# Altium PCB GSMMHMSlim.PcbDoc
Units mm, origin at the board's own origin, x right, y up, seen from the top; angles counter-clockwise.
Board outline 34.5 x 23.5 mm, 2 copper layers (Top Layer, Bottom Layer); 27 components, 34 nets, 158 pads, 112 vias.
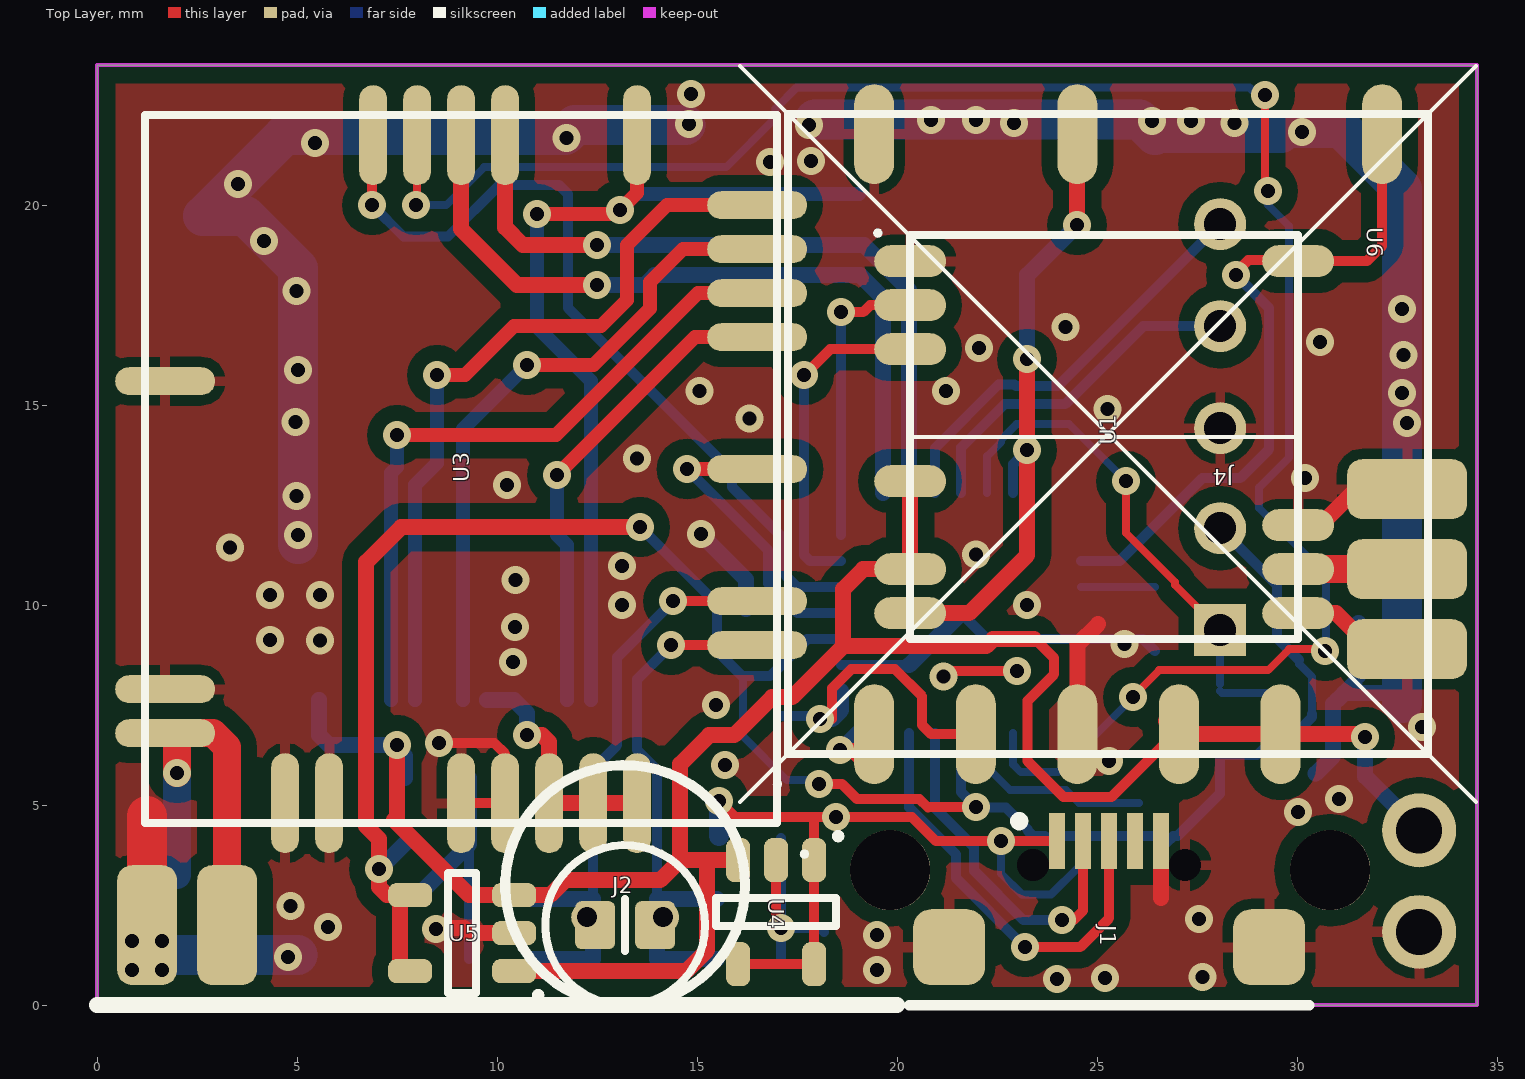
[diagram p0: Top Layer view]
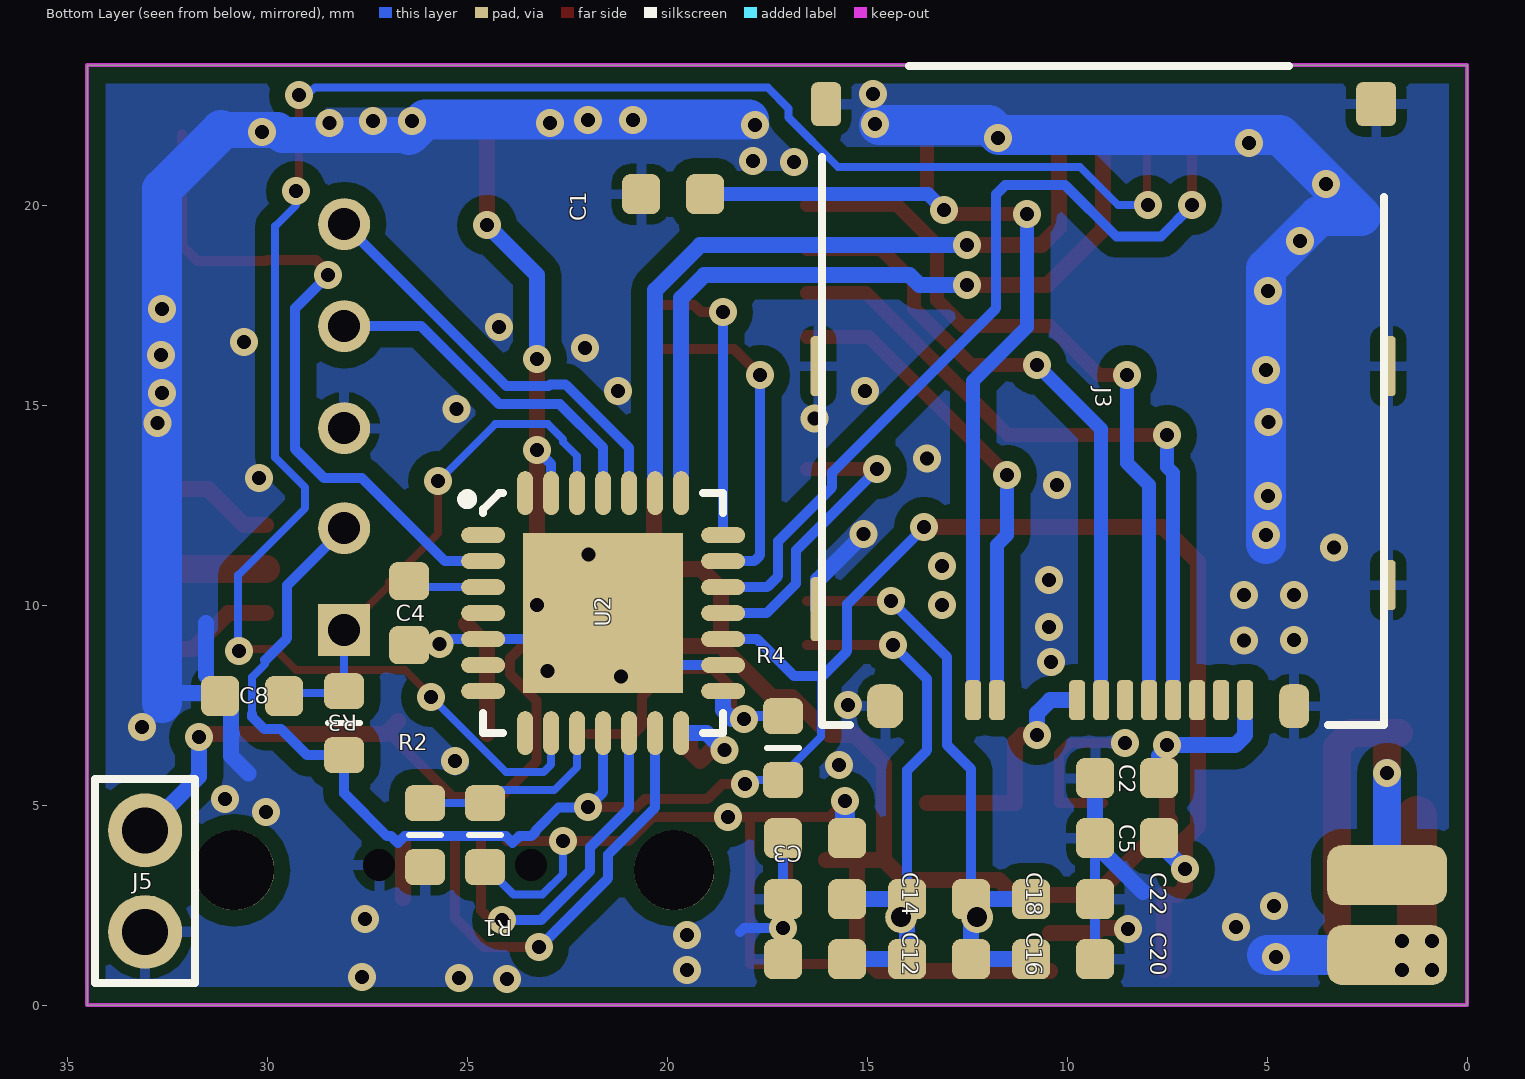
[diagram p1: Bottom Layer view, seen from below]
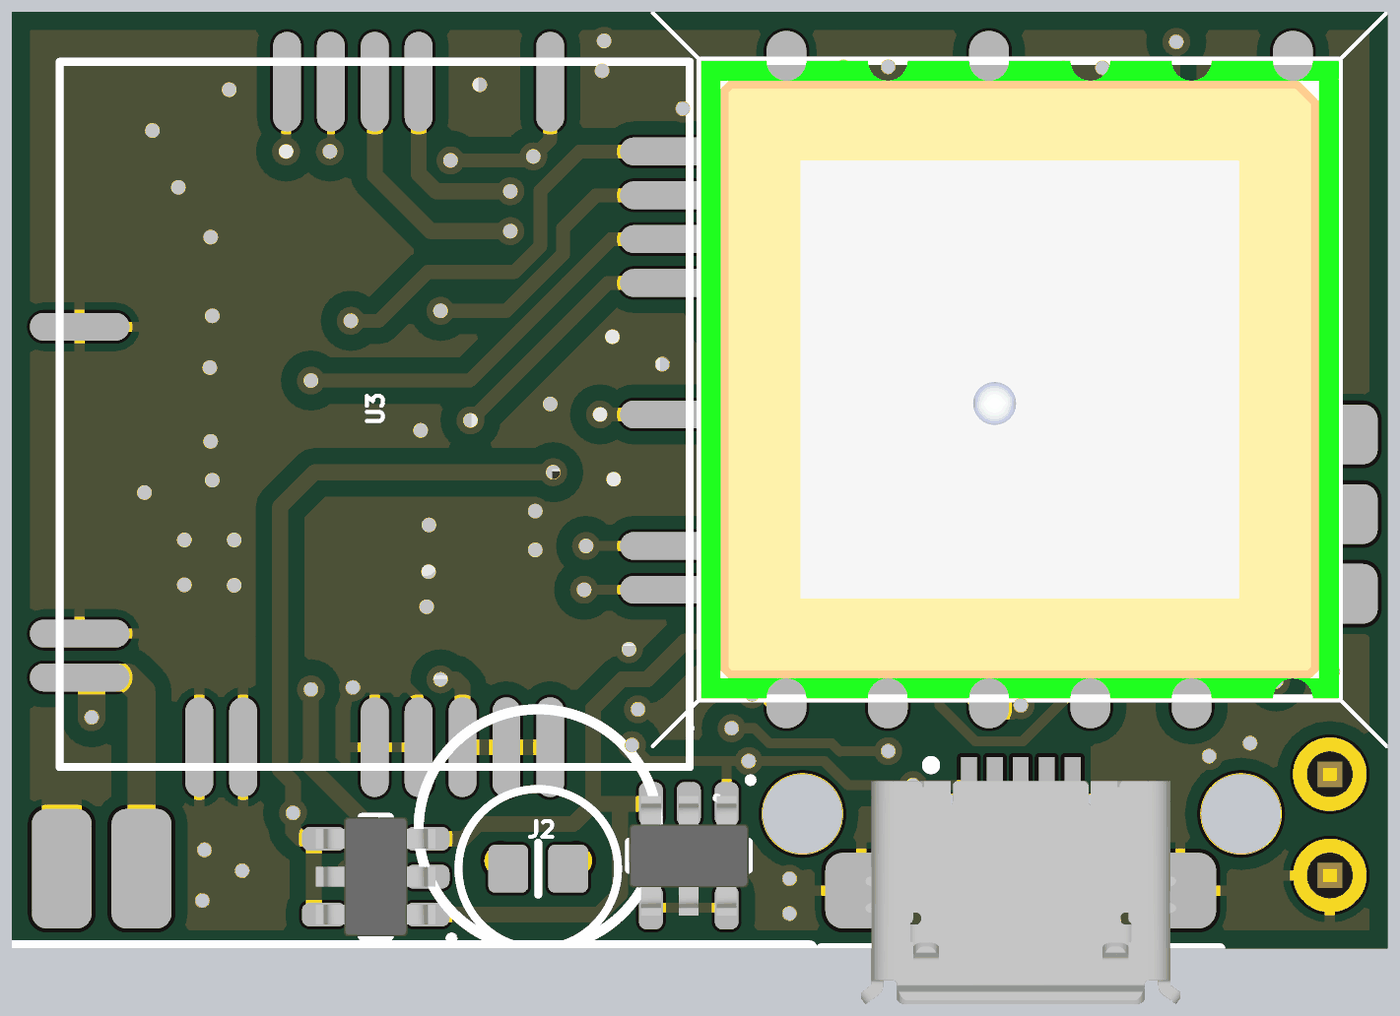
[diagram p2: 3D render of the assembled board from above, using the file's embedded part models]
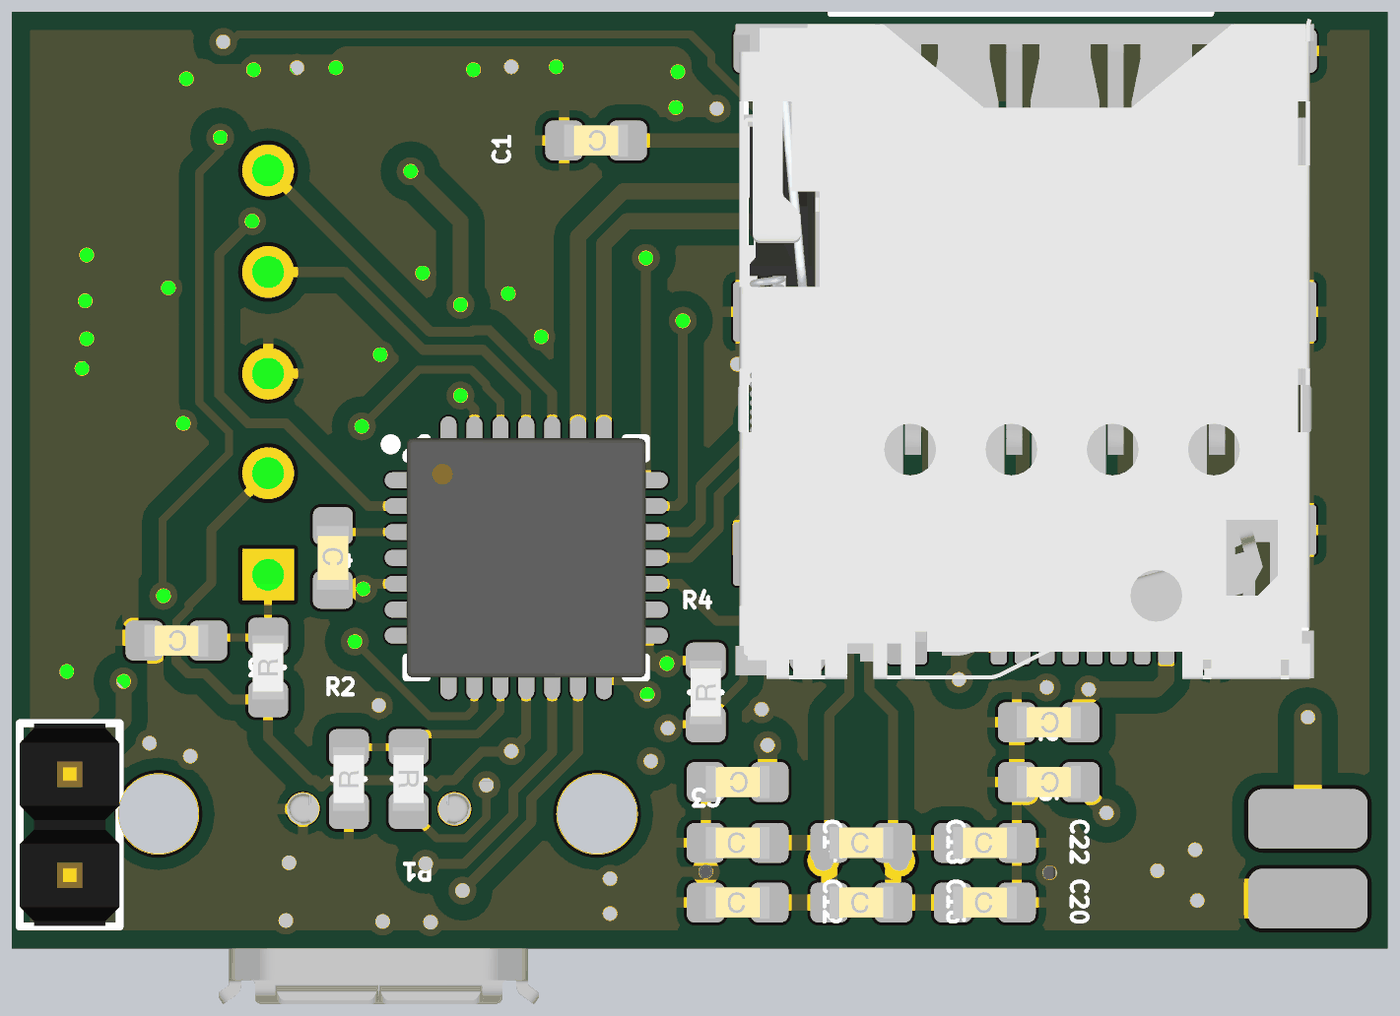
[diagram p3: 3D render of the assembled board from below, using the file's embedded part models]

## Layer stack, top to bottom
Top Solder: solder mask 0.0102, Solder Resist, Dk 3.5
Top Layer: signal copper 0.0356
Dielectric 1: dielectric 0.32, FR-4, Dk 4.8
Bottom Layer: signal copper 0.0356
Bottom Solder: solder mask 0.0102, Solder Resist, Dk 3.5

## Board outline
0,0 34.5,0 34.5,23.5 0,23.5

## Design rules (kind name [scope] priority, off if disabled: settings)
Clearance Clearance_110V_Keepout [InNetClass('110V') vs OnLayer('Keep-Out Layer')] p1: gap=0.3
Clearance Clearance_Q1Q2Q3 [(InComponent('Q1') OR InComponent('Q2') OR InComponent('Q3')) vs (InComponent('Q1') OR InComponent('Q2') OR InComponent('Q3'))] p2: gap=1
Clearance Clearance_110V_NoNet [InNetClass('110V') vs InNet('No Net')] p3: gap=0.5
Clearance Clearance_220V_110V [InNetClass('220V') vs InNetClass('110V')] p4: gap=1
Clearance Clearance_240VAC_220V [InNet('240VAC') vs InNetClass('220V')] p5: gap=1
Clearance Clearance_Poly [All vs InPolygon] p6: gap=0.4
Clearance Clearance_TrackAll [All vs IsTrack] p7: gap=0.2
Clearance Clearance_TrackU4 [InComponent('U4') vs IsTrack] p8: gap=0.25
Clearance Clearance_220V [InNetClass('220V')] p9: gap=2
Clearance Clearance_110V [InNetClass('110V')] p10: gap=1
Clearance [All] p11: gap=0.2
ComponentClearance [All] p1 off: gap=0.254 collisioncheckmode=3 verticalgap=0.254 showdistances=FALSE
Height [All] p1 off: minheight=0 maxheight=25.4 prefheight=12.7
PolygonConnect PolygonConnect_1 [InPadClass('Flooded')] p1: connectstyle=Direct reliefconductorwidth=0.254 reliefentries=4 polygonreliefangle="90 Angle" airgapwidth=0.254
PolygonConnect PolygonConnect_GND [All vs IsVia] p2: connectstyle=Direct reliefconductorwidth=0.254 reliefentries=4 polygonreliefangle="90 Angle" airgapwidth=0.254
PolygonConnect [All] p3: connectstyle=Relief reliefconductorwidth=0.254 reliefentries=4 polygonreliefangle="90 Angle" airgapwidth=0.254
RoutingVias [All] p1: holewidth=0.711 width=1.27 viastyle="Through Hole" minholewidth=0.711 minwidth=1.27 maxholewidth=0.711 maxwidth=1.27
SolderMaskExpansion [All] p1: expansion=0.102
UnpouredPolygon [All] p1: allowunpoured=FALSE
Width [All] p1: maxlimit=5 minlimit=0.2 preferedwidth=0.5
27 further rules are at their usual default settings.

## Classes and differential pairs
pad class Flooded: U1-3

## Components (designator, comment, footprint, x,y, rotation, side; value= is the part's Value field where it differs from the comment)
C1 "1uF" SMD_0603_CAPC1608X95N 19.85,20.275 r0 bottom
C2 "1uF" SMD_0603_CAPC1608X95N 8.5,5.675 r0 bottom
C3 "1uF" SMD_0603_CAPC1608X95N 16.3,4.175 r0 bottom
C4 "4.7uF" SMD_0603_CAPC1608X95N 26.45,9.8 r270 bottom
C5 "4.7uF" SMD_0603_CAPC1608X95N 8.5,4.175 r0 bottom
C8 "100nF" SMD_0603_CAPC1608X95N 30.375,7.725 r0 bottom
C12 "33pF" SMD_0603_CAPC1608X95N 16.3,1.15 r180 bottom
C14 "33pF" SMD_0603_CAPC1608X95N 16.3,2.65 r180 bottom
C16 "33pF" SMD_0603_CAPC1608X95N 13.2,1.15 r180 bottom
C18 "33pF" SMD_0603_CAPC1608X95N 13.2,2.65 r180 bottom
C20 "33pF" SMD_0603_CAPC1608X95N 10.1,1.15 r180 bottom
C22 "33pF" SMD_0603_CAPC1608X95N 10.1,2.65 r180 bottom
J1 "ATTEND 207A-BBA0-R" SMD_CON_MICRO_USB 25.3,4.1 r270 top
J2 "CON_2PINS" PTH_MIC_6MM_2.7MM_PITCH1.9 13.2,3 r180 top
J3 "MICRO SIM" SMD_CON-WURTH_MICRO_SIM_693021010811 9.1,7.125 r0 bottom
J4 "CON_5PINS" "SIP5 - PGM" 28.075,14.45 r90 top
J5 "CON_2PINS" PTH_HDRV02W64P254_1X02 33.05,3.1 r90 bottom
R1 "20k" SMD_0603_RESC1608X55N 24.55,4.25 r270 bottom
R2 "20k" SMD_0603_RESC1608X55N 26.05,4.25 r90 bottom
R3 "2k" SMD_0603_RESC1608X55N 28.075,7.05 r90 bottom
R4 "20k" SMD_0603_RESC1608X55N 17.1,6.425 r90 bottom
U1 "QUECTEL_L80 / L86" "SMD_MOD_L80_SOIC254P1600X1600-12N - NO UNUSED PINS" 25.275,14.275 r90 top locked
U2 "PIC18F27J53_QFN" SMD_QFN65P600X600X100-29AN 21.6,9.8 r180 bottom
U3 "QUECTEL_M66" "SMD_MOD_M66-44N - NO UNUSED PINS" 9.1,13.4 r180 top
U4 "MCP73811 450mA" "SMD_SOT26_SOT95P285X140-5N - DLV" 16.975,2.325 r270 top
U5 "BU33TD3WG" "SMD_SOT26_SOT95P285X140-5N - DLV" 9.125,1.8 r180 top
U6 "QUECTEL_L76" "SMD_MOD_L76_SOIC110P970X1010-18N - NO UNUSED PINS" 25.175,14.2 r0 top

## Footprints (in the part's own frame and the unit in brackets; to place one, negate y for a bottom-side part, rotate by r counter-clockwise, add the part's x,y. Pads: shape width x height; smd on the part's side, far side on the other; paste and mask are expansions set on the pad)
PTH_HDRV02W64P254_1X02 [mm]
  round 1.85 hole 1.15 mask+0.075: 1(-1.27,0) 2(1.27,0)
  silkscreen extent -2.55,-1.25 2.55,1.25, body extent -2.54,-1.25 2.54,1.25, height 8
PTH_MIC_6MM_2.7MM_PITCH1.9 [mm] "PMO-6027P-40KDQ(20120820)"
  round 0.8 hole 0.5: 1(-0.95,0.8) 2(0.95,0.8)
  rrect33% 1x1.2 smd mask+0.075: 1(-0.75,1) 2(0.75,1)
  silkscreen extent -3,-3 3,3, body extent -2.98,-2.99 3,2.99, height 6.45
"SIP5 - PGM" [mm]
  rect 1.3x1.3 hole 0.8: 1(-5.075,0)
  round 1.3 hole 0.8: 2(-2.525,0) 3(-0.025,0) 4(2.525,0) 5(5.075,0)
SMD_0603_CAPC1608X95N [mm]
  rrect42% 0.95x1 smd mask+0.075: 1(-0.8,0) 2(0.8,0)
  body extent -0.8,-0.4 0.8,0.4, height 0.95
SMD_0603_RESC1608X55N [mm]
  rrect44% 0.9x1 smd mask+0.075: 1(-0.8,0) 2(0.8,0)
  silkscreen extent 0,-0.4 0,0.4, body extent -0.8,-0.4 0.8,0.4, height 0.55
SMD_CON-WURTH_MICRO_SIM_693021010811 [mm] "WURTH Micro SIM 693021010811"
  rrect50% 0.4x1 smd mask+0.05: 1(3.25,-0.5) 2(0.05,-0.5) 3(-1.15,-0.5) 4(-2.35,-0.5) 5(2.65,-0.5) 6(-0.55,-0.5) 7(-1.75,-0.5) 8(-2.95,-0.5) 9(-3.55,-0.5) 10(0.65,-0.5)
  rrect67% 0.75x1.1 smd mask+0.05: 11(-4.775,-0.35)
  rrect67% 0.9x1.1 smd mask+0.05: 12(5.45,-0.35)
  rrect44% 0.375x1.6 smd mask+0.05: 13(7.125,-2.775)
  rrect44% 0.375x1.5 smd mask+0.05: 14(7.125,-8.85) 17(-7.125,-8.85)
  rrect44% 0.75x1.1 smd mask+0.05: 15(6.925,-15.4)
  rrect33% 1x1.1 smd mask+0.05: 16(-6.825,-15.4)
  rrect44% 0.375x1.25 smd mask+0.05: 18(-7.125,-3.375)
  silkscreen extent -7.02,-16.35 7.02,0.13, body extent -7.25,-16.21 7.25,0.38, height 1.2
SMD_CON_MICRO_USB [mm]
  rect 1.4x0.4 smd: 1(0,-1.3) 2(0,-0.65) 3(0,0) 4(0,0.65) 5(0,1.3)
  round 0.7 hole 0.8: 6(0.6,1.9) 9(0.6,-1.9)
  rrect50% 1.9x1.8 smd: 7(2.65,4) 8(2.65,-4)
  silkscreen extent -0.6,-5 4.1,5, body extent -0.1,-4 5.5,4, height 2.7
"SMD_MOD_L76_SOIC110P970X1010-18N - NO UNUSED PINS" [mm] "Quectel L76"
  oval 1.8x0.8 smd mask+0.075: 1(-4.85,4.4) 2(-4.85,3.3) 3(-4.85,2.2) 6(-4.85,-1.1) 8(-4.85,-3.3) 9(-4.85,-4.4) 10(4.85,-4.4) 11(4.85,-3.3) 12(4.85,-2.2) 18(4.85,4.4)
  silkscreen extent -5.77,-5.05 4.85,5.22, body extent -4.85,-5.05 4.85,5.05, height 2.52
"SMD_MOD_L80_SOIC254P1600X1600-12N - NO UNUSED PINS" [mm] "Quectel L80 L86"
  oval 2.5x1 smd mask+0.075: 1(-7.5,5.85) 2(-7.5,3.31) 3(-7.5,0.77) 4(-7.5,-1.77) 5(-7.5,-4.31) 7(7.5,-6.85) 10(7.5,0.77) 12(7.5,5.85)
  silkscreen extent -9.2,-9.2 9.2,9.2, body extent -8,-8 8,8, height 6.95
"SMD_MOD_M66-44N - NO UNUSED PINS" [mm] "Quectel M66"
  oval 2.5x0.7 smd mask+0.075: 3(-7.4,4.4) 4(-7.4,3.3) 7(-7.4,0) 10(-7.4,-3.3) 11(-7.4,-4.4) 12(-7.4,-5.5) 13(-7.4,-6.6) 27(7.4,-2.2) 34(7.4,5.5) 35(7.4,6.6)
  oval 0.7x2.5 smd mask+0.075: 14(-4.4,-8.35) 17(-1.1,-8.35) 18(0,-8.35) 19(1.1,-8.35) 20(2.2,-8.35) 36(4.4,8.35) 37(3.3,8.35) 40(0,8.35) 41(-1.1,8.35) 42(-2.2,8.35) 43(-3.3,8.35) 44(-4.4,8.35)
  silkscreen extent -8.69,-8.85 7.9,9.73, body extent -7.9,-8.85 7.9,8.85, height 2.3
SMD_QFN65P600X600X100-29AN [mm]
  oval 1.1x0.4 smd mask+0.05: 1(-3,1.95) 2(-3,1.3) 3(-3,0.65) 4(-3,0) 5(-3,-0.65) 6(-3,-1.3) 7(-3,-1.95) 15(3,-1.95) 16(3,-1.3) 17(3,-0.65) 18(3,0) 19(3,0.65) 20(3,1.3) 21(3,1.95)
  oval 0.4x1.1 smd mask+0.05: 8(-1.95,-3) 9(-1.3,-3) 10(-0.65,-3) 11(0,-3) 12(0.65,-3) 13(1.3,-3) 14(1.95,-3) 22(1.95,3) 23(1.3,3) 24(0.65,3) 25(0,3) 26(-0.65,3) 27(-1.3,3) 28(-1.95,3)
  rect 4x4 smd paste-0.95 mask+0.05: 29(0,0)
  silkscreen extent -3.53,-3 3,3, body extent -3,-3 3.01,3.01, height 1
"SMD_SOT26_SOT95P285X140-5N - DLV" [mm]
  rrect67% 1.1x0.6 smd mask+0.075: 1(-1.3,0.95) 2(-1.3,0) 3(-1.3,-0.95) 4(1.3,-0.95) 5(1.3,0.95)
  silkscreen extent -2.05,-1.5 0.35,1.7, body extent -1.5,-1.5 1.5,1.5, height 1.2

## Part data
C1 C2 C3 C4 C5 C8 C12 C14 C16 C18 C20 C22: library part C
J1: library part CON_USB_MINI
J3: library part CON_2ROWS_18PINS
R1 R2 R3 R4: library part R
U1: library part MOD_QUECTEL_L80_L86
U2: library part IC_PIC18F27J53_QFN
U3: library part MOD_QUECTEL_M66
U4: "MCP73812"
U5: library part IC_BU33TD3WG
U6: library part MOD_QUECTEL_L76

## Free pads (board coordinates)
  rrect50% 1.5x3 smd: 0(1.25,2) 0(3.25,2)
  rrect50% 3x1.5 smd far side: 0(2,1.25) 0(2,3.25)
  rrect50% 3x1.5 smd: 0(32.75,8.9) 0(32.75,10.9) 0(32.75,12.9)
  round 2 hole 2: 1(19.825,3.375) 1(30.825,3.375)

## Via types
v1: diameter 0.7, hole 0.35, Top Layer to Bottom Layer, tented both sides, 112 vias

## Nets (pads, with @x,y where several pads share a name; then routed paths per layer and width w, separated by ;. In a path a pad name is that pad's centre, name@x,y a point inside that pad or via, vN(x,y) a via of type N, cw(c..) or ccw(c..) an arc to the next point about the centre after c; other vN are vias at no path point)
3.3V: C5.1 J4.2 R3.1 R4.1 U2.11 U2.17 U5.4 U5.5 | length 53.3
  Top Layer w0.25: v1@18.275,5.525 18.625,5.525 19,5.15 20.56,5.15 20.772,4.938 20.784,4.95 v1(21.975,4.95)
  Top Layer w0.4: U5.5@7.575,0.875 7.575,2.775 7.25,2.75 7.05,2.95 v1(7.05,3.4) 7.05,4.151 6.725,4.476 6.725,11.075 7.6,11.95 v1(13.575,11.95)
  Bottom Layer w0.2: 16.15,8.225 16.15,6.715 17.24,5.625 18.175,5.625 v1@18.275,5.525 ; 30.05,8.625 30.05,8.532 30.375,8.207 30.375,7.282
  Bottom Layer w0.25: v1(13.575,11.95) 15.5,10.025 15.5,8.85 16.15,8.2 ; 16.15,8.225 16.825,8.225 17.75,9.15 U2.17 ; U2.11 21.6,5.325 21.987,4.938 22.716,4.938 23.275,4.38 23.275,4.35 23.4,4.225 23.7,4.225 23.866,4.06 24.031,4.225 26.569,4.225 26.734,4.06 26.9,4.225 27.004,4.225 28.075,5.296 R3.1 29,6.25 29.65,6.9 30.068,6.9 30.375,7.207 30.375,7.282 ; J4.2 29.5,10.5 29.5,9.175 30.05,8.625
  Bottom Layer w0.4: v1(7.05,3.4) C5.1@7.825,4.175
  other v1: 18.05,5.525
4.0V: C2.1 J3.9 J5.2 U1.4 U1.5 U4.3 U5.1 U5.3 U6.6 U6.8 | length 57.2
  Top Layer w0.25: 23.437,9.163 23.925,8.675 23.925,8.273 23.263,7.611 23.263,6.1 24.163,5.2 25.355,5.2 26.93,6.775 U1.4
  Top Layer w0.4: v1(7.5,6.5) 7.5,4.7 7.425,4.625 9.3,2.75 U5.3 11.325,2.75 11.7,3.125 14.075,3.125 14.575,3.625 ; U5.1 14.725,0.85 15.25,1.375 15.25,3.625 ; U4.3 15.25,3.625 ; U6.6 U6.8 19.15,10.9 18.65,10.4 18.65,8.975 ; 23.425,9.15 22.4,9.15 22.225,8.975 18.65,8.975 ; U1.4@26.725,7.1 U1.4@27.05,6.775 ; U1.4 U1.4@27.05,6.775 ; v1@31.7,6.775 U1.5 U1.4@27.05,6.775 ; 14.575,3.625 14.575,6.025 15.3,6.75 15.925,6.75 16.875,7.7 17.375,7.7 18.65,8.975 ; 14.575,3.625 15.25,3.625
  Bottom Layer w0.4: J3.9 5.55,6.75 5.8,6.5 7.425,6.5 7.7,6.225 C2.1 ; v1@31.7,6.775 31.7,5.72 J5.2
  other v1: 31.7,6.7
5.0V: C3.1 J1.1 J1.9 R1.2 U4.1 U4.4 U4.5 | length 18.6
  Top Layer w0.25: v1(15.55,5.1) 15.95,4.7 17.925,4.7 ; U4.4 U4.5 U4.1 17.925,4.7 ; J1.1 20.974,4.1 20.374,4.7 17.925,4.7
  Bottom Layer w0.2: C3.1 C3.1@15.55,4.225 ; v1(22.6,4.1) 22.6,3.286 23.122,2.764 23.845,2.764 24.531,3.45 R1.2
  Bottom Layer w0.5: C3.1@15.55,4.225 v1(15.55,5.1)
  other v1: 18.475,4.7
DM/D-: J1.2 U2.12 | length 9
  Top Layer w0.25: v1@24.054,2.125 24.406,2.125 24.65,2.369 J1.2
  Bottom Layer w0.25: U2.12 20.95,4.925 21.925,3.95 21.925,3.36 23.16,2.125 v1(24.125,2.125)
DP/D+: J1.3 U2.13 | length 10.9
  Top Layer w0.25: v1(23.2,1.45) 24.575,1.45 25.3,2.175 J1.3
  Bottom Layer w0.25: U2.13 20.3,4.938 21.475,3.763 21.475,3.173 23.198,1.45 v1(23.2,1.45)
FORCE_ON: U1.7 U2.2 U6.18 | length 17.4
  Top Layer w0.25: v1(28.475,18.25) 28.475,18.325 28.775,18.625 30,18.625 U6.18 31.741,18.6 32.125,18.984 U1.7
  Bottom Layer w0.25: U2.2 25.554,11.1 27.629,13.175 28.575,13.175 29.3,13.9 29.3,17.425 v1(28.475,18.25)
GND: C1.2 C2.2 C3.2 C4.2 C5.2 C8.2 C12.1 C14.1 C20.2 C22.2 J1.5 J1.6 J1.7 J1.8 J3.11 J3.12 J3.13 J3.14 J3.15 J3.16 J3.17 J3.18 J4.3 J5.1 pad.0@1.25,2 pad.0@2,1.25 pad.0@32.75,8.9 pad.0@32.75,12.9 R2.1 U1.3 U1.12 U2.5 U2.16 U2.29 U3.27 U3.34 U3.36 U3.37 U3.40 U3.41 U4.2 U5.2 U6.1 U6.10 U6.12 | length 104.5
  Top Layer w0.25: v1(8.55,6.55) 9.935,6.55 10.2,6.285 U3.41 U3.40 ; U4.2 16.975,2.05 v1(17.1,1.925) ; v1@21.156,8.167 21.339,8.35 23.091,8.35 v1@23.191,8.25
  Top Layer w0.4: v1(8.475,1.9) 8.5,1.925 9.175,1.925 9.3,1.8 U5.2 ; U1.3 24.505,9.005 25.025,9.525 ; 26.6,2.685 J1.5 ; U6.10 30.975,9.8 31.875,8.9 pad.0@32.75,8.9 ; U6.12 30.575,12 31.475,12.9 pad.0@32.75,12.9
  Top Layer w1: pad.0@1.25,2 1.25,4.725
  Bottom Layer w0.25: C20.2 9.3,4.025 C5.2 ; C12.1 v1(17.1,1.925) ; C3.2 C14.1 v1(17.1,1.925) ; 18.175,1.83 18.08,1.925 v1(17.1,1.925) ; U2.16 U2.29@20.3,8.5 ; U2.29 22.25,9.15 U2.5 26.15,9.15 C4.2@26.45,8.85
  Bottom Layer w0.4: 8.1,2.825 9.3,4.025 C5.2 C2.2 ; v1(15.09,11.775) 16.225,10.64 J3.13 ; U2.29@20.3,8.5 U2.29 ; 30.462,5.79 30.9,6.228 C8.2@30.9,7.525 ; 30.875,6.775 30.9,6.8 ; C8.2@31,7.625 C8.2@31.175,7.8 ; C8.2@31.438,8.063 C8.2@31.175,7.8 ; 31.528,8.237 31.528,9.549 ; 32.625,7.55 32.375,7.8 C8.2@31.175,7.8
  Bottom Layer w0.9: 26.45,21.75 29.614,21.75 29.739,21.875 31.149,21.875
  Bottom Layer w1: pad.0@2,1.25 v1@5.007,1.25 ; v1@5.025,11.526 5.025,18.411 3.711,19.725 2.65,19.725 4.675,21.75 11.7,21.75 11.95,22 v1@14.709,22 ; v1@17.95,22.14 26.06,22.14 26.45,21.75 ; 31.149,21.875 32.625,20.399 v1(32.625,17.4) v1(32.625,15.3) 32.625,7.55
  other v1: 24,0.657 25.2,0.675 27.629,0.7 0.875,0.875 1.625,0.875 19.5,0.875 4.775,1.2 0.875,1.6 1.625,1.6 19.5,1.75 5.775,1.95 27.55,2.15 4.829,2.475 30.025,4.825 31.05,5.15 15.7,6 25.3,6.1 33.125,6.95 15.475,7.507 21.156,8.217 22.991,8.35 10.401,8.574 25.687,9.023 4.325,9.125 5.575,9.112 10.449,9.452 13.125,10 23.25,10 4.325,10.25 5.575,10.25 10.458,10.627 13.125,10.975 21.965,11.268 3.325,11.44 5.025,11.75 4.985,12.725 10.25,13 30.2,13.175 13.5,13.664 32.742,14.552 4.963,14.575 16.311,14.661 25.261,14.9 15.059,15.35 21.225,15.35 5.025,15.875 32.66,16.25 22.05,16.432 30.575,16.575 24.202,16.95 4.985,17.85 4.175,19.1 3.525,20.525 16.825,21.075 17.85,21.1 5.45,21.55 11.733,21.675 30.125,21.825 17.8,22 14.8,22.025 22.925,22.05 28.438,22.05 26.375,22.1 27.35,22.1 20.85,22.125 21.975,22.125 14.85,22.775
GPS_ANT: pad.0@32.75,10.9 U6.11 | length 2.7
  Top Layer w0.7: U6.11 pad.0@32.75,10.9
GPS_RST: U1.10 U2.27 U6.9 | length 15.8
  Top Layer w0.4: U6.9 21.8,9.8 23.25,11.25 v1(23.25,13.875) v1(23.25,16.15) ; v1(24.5,19.5) 24.5,21.77 U1.10
  Bottom Layer w0.25: U2.27 22.9,13.525 v1(23.25,13.875)
  Bottom Layer w0.4: v1(23.25,16.15) 23.25,18.25 v1(24.5,19.5)
GPS_RX: U1.1 U2.14 | length 2.8
  Top Layer w0.4: v1@18.565,6.35 18.925,6.35 19.175,6.1 19.425,6.35 U1.1
  Bottom Layer w0.4: v1@18.565,6.35 18.665,6.45 19.015,6.8 U2.14
  other v1: 18.565,6.375
GPS_RX_L76: U2.20 U6.3 | length 8.4
  Top Layer w0.25: v1(17.675,15.75) 18.325,16.4 U6.3
  Bottom Layer w0.25: v1(17.675,15.75) 17.675,11.25 17.825,11.1 U2.20
GPS_TX: R4.2 U1.2 U2.15 | length 7.8
  Top Layer w0.25: v1@18.375,7.15 18.375,7.925 18.85,8.4 19.947,8.4 20.625,7.722 20.625,7 20.85,6.775 U1.2
  Bottom Layer w0.25: R4.2 18.3,7.225 v1@18.375,7.15
  Bottom Layer w0.4: v1@18.375,7.15 18.6,7.375 U2.15
  other v1: 18.075,7.15
GPS_TX_L76: U2.21 U6.2 | length 7.4
  Top Layer w0.25: v1(18.6,17.325) 19.15,17.325 19.325,17.5 U6.2
  Bottom Layer w0.25: U2.21 v1(18.6,17.325)
GSM_DTR: U2.9 U3.19 | length 49.5
  Top Layer w0.2: v1(7.975,20) 8,20.025 U3.19 ; v1@25.887,7.712 26.55,8.375 29.275,8.375 29.8,8.9 v1@30.725,8.9 ; v1(29.2,22.75) 29.2,20.425 v1(29.275,20.35)
  Bottom Layer w0.2: v1(7.975,20) 8.725,20 9.675,20.95 15.725,20.95 16.964,22.189 16.964,22.419 17.485,22.94 28.81,22.94 29,22.75 v1(29.2,22.75) ; U2.9 22.9,6.016 23.091,5.825 24.025,5.825 v1(25.9,7.7) v1@25.9,7.725 ; v1(29.275,20.35) 29.275,20 29.8,19.475 29.8,13.694 29.05,12.944 29.05,12.425 30.725,10.75 v1@30.725,8.9
  other v1: 30.7,8.85
GSM_PWRKEY: U2.18 U3.7 | length 7.7
  Top Layer w0.35: v1@14.75,13.275 v1(14.75,13.4) U3.7
  Bottom Layer w0.25: v1(14.75,13.4) 16.775,11.375 16.775,10.539 17.514,9.8 U2.18
GSM_RI: U2.19 U3.20 | length 20.9
  Top Layer w0.25: v1(6.875,20) 6.875,21.725 U3.20
  Bottom Layer w0.25: v1(6.875,20) 7.657,19.218 8.768,19.218 10.05,20.5 11.55,20.5 11.775,20.275 11.775,17.425 15.875,13.325 15.875,12.95 17.225,11.6 17.225,10.725 17.5,10.45 U2.19
GSM_RX: U2.22 U3.18 | length 18.7
  Top Layer w0.4: U3.18 9.1,19.4 10.5,18 v1(12.5,18)
  Bottom Layer w0.4: v1(12.5,18) 13.688,18 13.938,18.25 19.075,18.25 19.65,17.675 U2.22
GSM_TX: U2.23 U3.17 | length 18.1
  Top Layer w0.4: U3.17 10.2,19.446 10.646,19 v1(12.5,19)
  Bottom Layer w0.4: v1(12.5,19) 19.174,19 20.3,17.874 U2.23
GSM_VDD: J3.10 U3.42 U3.43 U3.44 | length 6
  Top Layer w0.4: v1(10.75,6.75) 11.125,6.75 11.3,6.575 U3.42 U3.43 U3.44
  Bottom Layer w0.4: J3.10 10.425,7.625 10.75,7.3 v1(10.75,6.75)
MCLR: C8.1 J4.1 R3.2 U2.26 | length 12.9
  Top Layer w0.2: v1(25.725,13.1) 25.725,11.8 26.95,10.575 26.95,10.5 J4.1
  Bottom Layer w0.2: U2.26 22.25,13.724 22.6,14.074 22.6,14.144 22.981,14.525 24.3,14.525 v1(25.725,13.1) ; R3.2 28.125,7.8 C8.1@29.575,7.8 ; R3.2@28.075,8.025 J4.1
MICN: C16.2 C18.2 C20.1 C22.1 J2.2 U3.4 | length 14.9
  Top Layer w0.25: v1@14.375,10.075 v1(14.4,10.1) U3.4
  Bottom Layer w0.25: C18.2 12.4,5.9 13,6.5 13,8.7 v1@14.375,10.075
  Bottom Layer w0.4: C20.1 C16.2 C18.2 C22.1
MICP: C12.2 C14.2 C16.1 C18.1 J2.1 U3.3 | length 13.6
  Top Layer w0.25: v1(14.35,9) U3.3
  Bottom Layer w0.25: C18.1 14,5.875 13.5,6.375 13.5,8.15 v1(14.35,9)
  Bottom Layer w0.4: C12.2 C16.1 C18.1 C14.2
PGC: J4.5 U2.24 | length 10.6
  Bottom Layer w0.25: U2.24 20.95,13.929 22.536,15.515 22.931,15.515 22.97,15.475 24.014,15.475 28.064,19.525 J4.5
PGD: J4.4 U2.25 | length 8.9
  Bottom Layer w0.25: U2.25 21.6,13.942 22.683,15.025 24.2,15.025 26.15,16.975 J4.4
RF_ANT: pad.0@2,3.25 pad.0@3.25,2 U3.35 | length 9.4
  Top Layer w0.7: U3.35 2.9,6.8 3.25,6.45 pad.0@3.25,2 ; v1(2,5.8) U3.35@2,6.5
  Bottom Layer w0.7: pad.0@2,3.25 v1(2,5.8)
SIM_CLK: J3.3 U3.13 | length 18.9
  Top Layer w0.35: v1(8.5,15.75) 9.2,15.75 10.425,16.975 12.6,16.975 13.25,17.625 13.25,19 14.25,20 U3.13
  Bottom Layer w0.35: J3.3 7.95,13 8.5,13.55 v1(8.5,15.75)
SIM_GND: J3.5 U3.10 | length 12.2
  Top Layer w0.35: v1(11.5,13.25) 14.95,16.7 U3.10
  Bottom Layer w0.35: v1(11.5,13.25) 11.5,11.75 11.75,11.5 J3.5
SIM_IO: J3.7 U3.11 | length 17.2
  Top Layer w0.35: v1(7.5,14.25) 11.475,14.25 15.025,17.8 U3.11
  Bottom Layer w0.35: J3.7 7.35,13.3 7.5,13.45 v1(7.5,14.25)
SIM_RST: J3.2 U3.12 | length 16.4
  Top Layer w0.35: v1(10.75,16) 12.403,16 13.825,17.422 13.825,18.075 14.65,18.9 U3.12
  Bottom Layer w0.35: J3.2 9.15,14.4 v1(10.75,16)
SIM_VDD: C1.1 J3.1 U3.14 | length 23
  Top Layer w0.35: v1(11,19.775) 12.975,19.775 v1(13.075,19.875) 13.5,20.3 U3.14
  Bottom Layer w0.35: v1(11,19.775) 11,16.95 12.35,15.6 J3.1 ; v1(13.075,19.875) 13.475,20.275 C1.1
SIM_VPP: J3.6
TEST: U2.28
USB_SENSE: R1.1 R2.2 U2.10 | length 5
  Bottom Layer w0.2: U2.10 22.25,5.95 22.825,5.375 24.225,5.375 R1.1 R2.2
VCAP: C4.1 U2.3 | length 1.9
  Bottom Layer w0.2: U2.3 C4.1@26.45,10.45
pads on no net: J1.4 J3.4 J3.8 U2.1 U2.4 U2.6 U2.7 U2.8

## Polygon pours and split planes (outlines as drawn)
GND on Top Layer "Top Layer-No Net" (solid, pour order 7): 0,0.05 34.5,0.05 34.5,23.5 0,23.5
GND on Bottom Layer "Top Layer-No Net1" (solid, pour order 8): 0,0 34.5,0 34.5,23.5 0,23.5

## Keep-outs
Keep-Out Layer:
  the board outline again, w0.1

## Silkscreen, mask and mechanical layers (free items; w line width, h text height)
Top Overlay:
  lines w0.4: 0,0 20,0

## Text inside footprints (layer, text, board x,y; h text height)
J5: Mechanical 3 "1" at 32.1,0.79 h0.5 r270